# Altium PCB MB_v2.PcbDoc
Units mm, origin at the board's own origin, x right, y up, seen from the top; angles counter-clockwise.
Board outline 152.4 x 101.6 mm, 2 copper layers (Top Layer, Bottom Layer); 66 components, 63 nets, 264 pads, 11 vias.
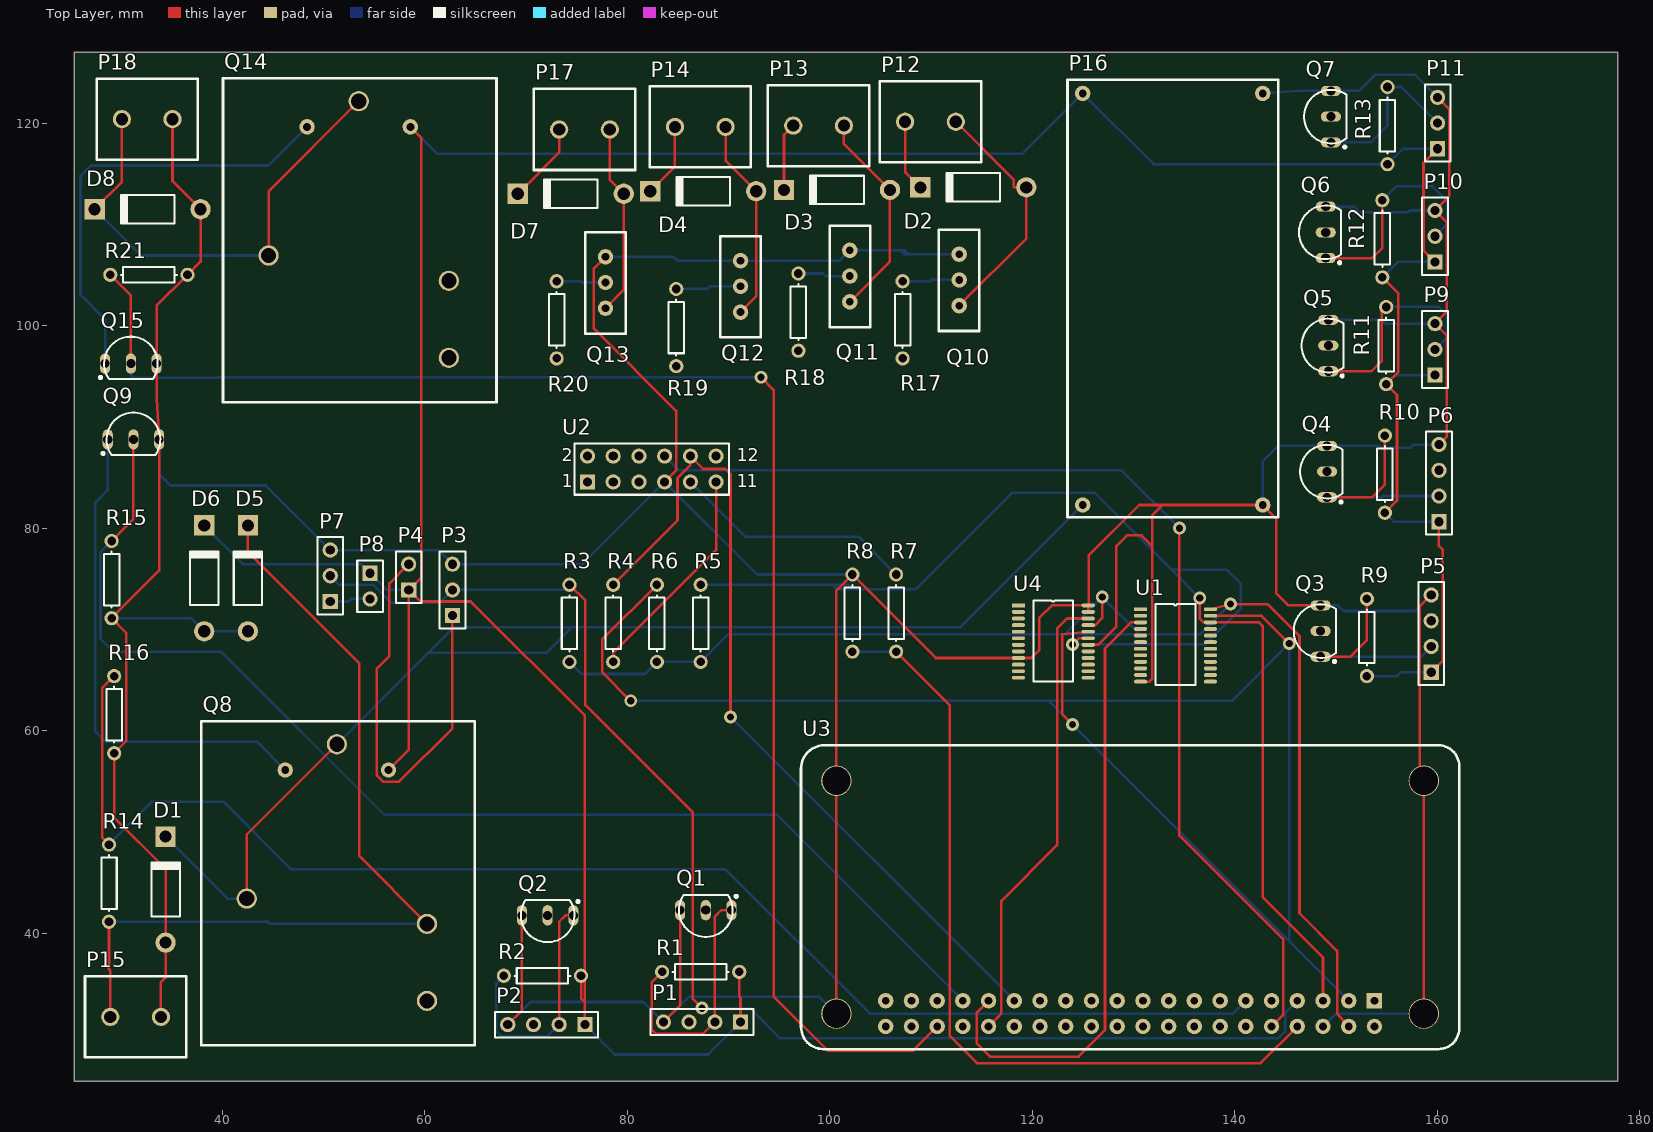
[diagram p0: Top Layer view]
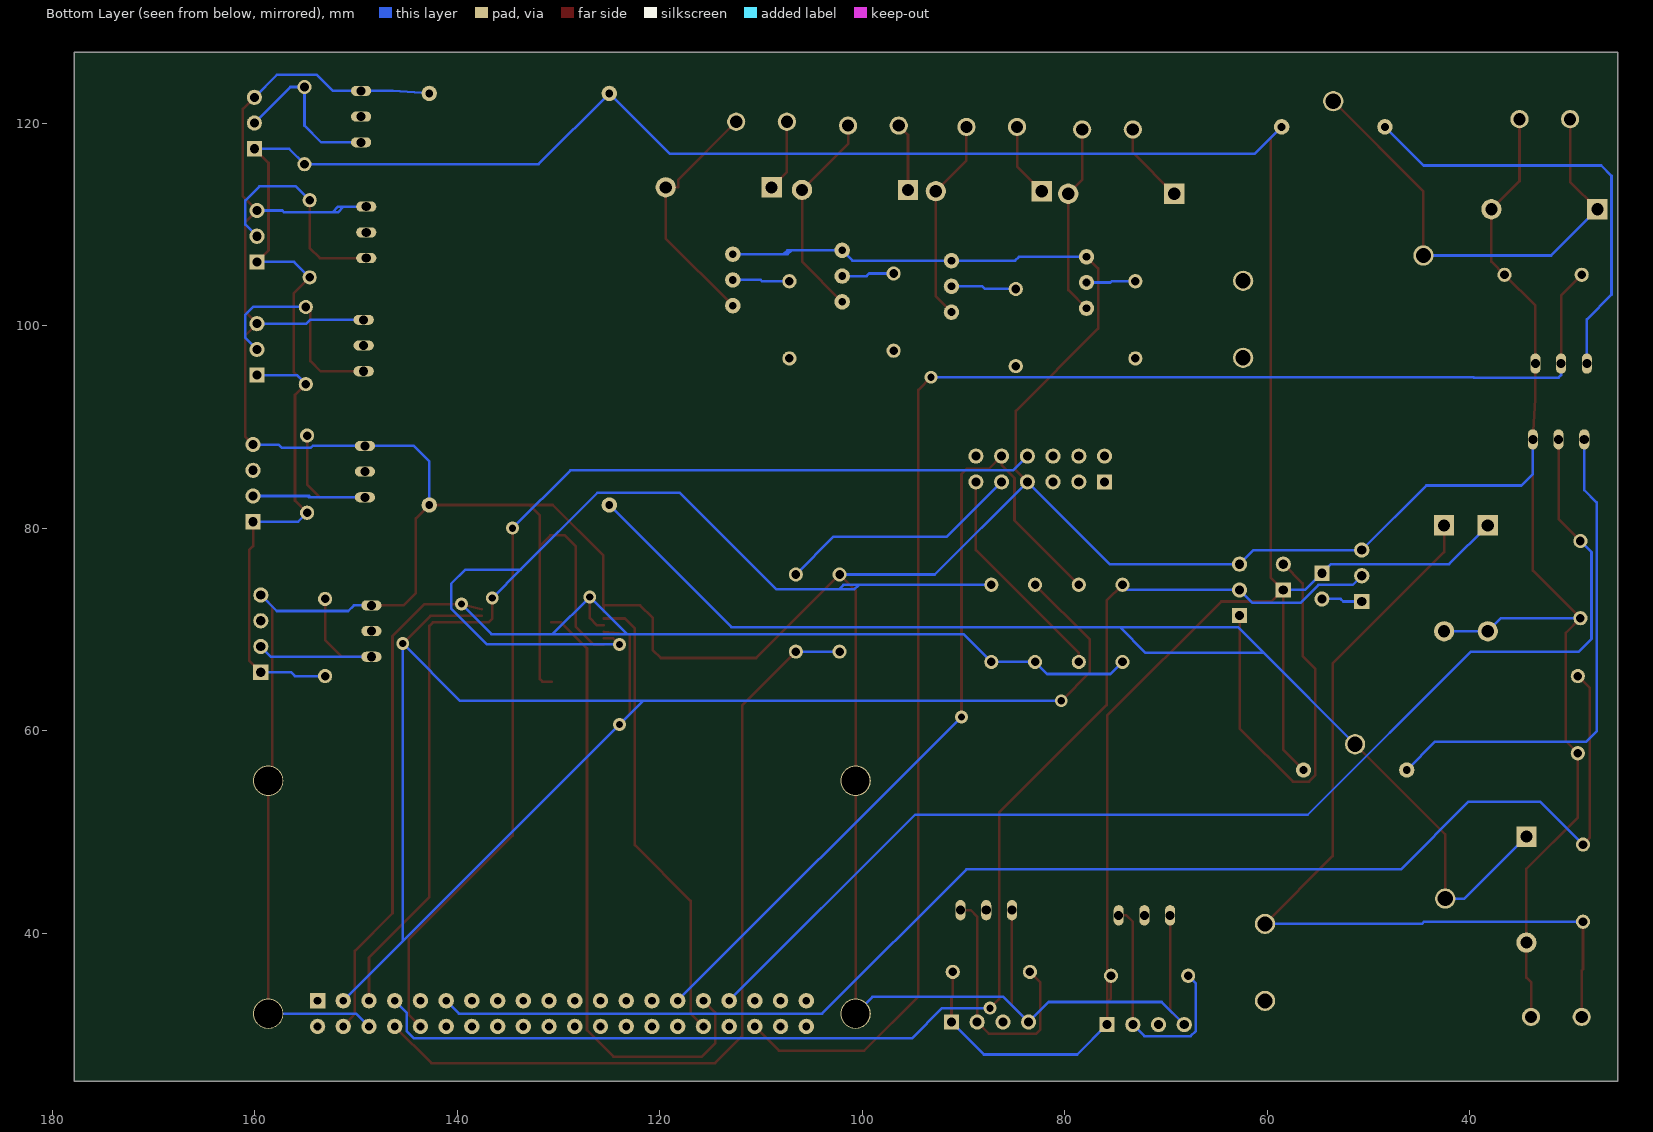
[diagram p1: Bottom Layer view, seen from below]

## Layer stack, top to bottom
Top Solder: solder mask 0.0102, Solder Resist, Dk 3.5
Top Layer: signal copper 0.0356
Dielectric 1: dielectric 0.32, FR-4, Dk 4.8
Bottom Layer: signal copper 0.0356
Bottom Solder: solder mask 0.0102, Solder Resist, Dk 3.5

## Board outline
25.4,25.4 177.8,25.4 177.8,127 25.4,127

## Design rules (kind name [scope] priority, off if disabled: settings)
Clearance [All] p1: gap=0.254
PolygonConnect [All] p1: connectstyle=Relief reliefconductorwidth=0.254 reliefentries=4 polygonreliefangle="90 Angle" airgapwidth=0.254
RoutingVias [All] p1: holewidth=0.711 width=1.27 viastyle="Through Hole" minholewidth=0.711 minwidth=1.27 maxholewidth=0.711 maxwidth=1.27
SolderMaskExpansion [All] p1: expansion=0.102
UnpouredPolygon [All] p1: allowunpoured=FALSE
Width [All] p1: maxlimit=0.254 minlimit=0.254 preferedwidth=0.254
29 further rules are at their usual default settings.

## Components (designator, comment, footprint, x,y, rotation, side; value= is the part's Value field where it differs from the comment)
D1 "Diode 1N4007" DO-41 34.417,44.323 r90 top
D2 "Diode 1N4007" DO-41 114.173,113.665 r180 top
D3 "Diode 1N4007" DO-41 100.711,113.411 r180 top
D4 "Diode 1N4007" DO-41 87.503,113.284 r180 top
D5 "Diode 1N4007" DO-41 42.545,75.057 r90 top
D6 "Diode 1N4007" DO-41 38.227,75.057 r90 top
D7 "Diode 1N4007" DO-41 74.422,113.03 r180 top
D8 "Diode 1N4007" DO-41 32.639,111.506 r180 top
P1 "Header 4" HDR1X4 91.186,31.242 r180 top
P2 "Header 4" HDR1X4 75.819,30.988 r180 top
P3 "Header 3" HDR1X3 62.738,71.374 r90 top
P4 "Header 2" HDR1X2 58.42,73.914 r90 top
P5 "Header 4" HDR1X4 159.385,65.786 r90 top
P6 "Header 4" HDR1X4 160.147,80.645 r90 top
P7 "Header 3" HDR1X3 50.673,72.771 r90 top
P8 "Header 2" HDR1X2 54.61,75.565 r270 top
P9 "Header 3" HDR1X3 159.766,95.123 r90 top
P10 "Header 3" HDR1X3 159.766,106.299 r90 top
P11 "Header 3" HDR1X3 160.02,117.475 r90 top
P12 "Header 2" "Screw Terminal 2" 107.442,120.142 r0 top
P13 "Header 2" "Screw Terminal 2" 96.393,119.761 r0 top
P14 "Header 2" "Screw Terminal 2" 84.709,119.634 r0 top
P15 "Header 2" "Screw Terminal 2" 28.956,31.75 r0 top
P16 "Regulator" "LM2596 Module" 124.968,82.296 r90 top
P17 "Header 2" "Screw Terminal 2" 73.279,119.38 r0 top
P18 "Header 2" "Screw Terminal 2" 30.099,120.396 r0 top
Q1 "2N2222" TO-226AA 87.757,42.291 r180 top
Q2 "2N2222" TO-226AA 72.136,41.783 r180 top
Q3 "2N2222" TO-226AA 148.463,69.85 r90 top
Q4 "2N2222" TO-226AA 149.098,85.598 r90 top
Q5 "2N2222" TO-226AA 149.225,98.044 r90 top
Q6 "2N2222" TO-226AA 148.971,109.22 r90 top
Q7 "2N2222" TO-226AA 149.479,120.65 r90 top
Q8 "Relay" Relay 46.228,56.134 r90 top
Q9 "2N2222" TO-226AA 31.242,88.773 r0 top
Q10 "IRLB8721" TO-220AB 112.776,101.981 r90 top
Q11 "IRLB8721" TO-220AB 101.981,102.362 r90 top
Q12 "IRLB8721" TO-220AB 91.186,101.346 r90 top
Q13 "IRLB8721" TO-220AB 77.851,101.727 r90 top
Q14 "Relay" Relay 48.387,119.634 r90 top
Q15 "2N2222" TO-226AA 30.988,96.266 r0 top
R1 "Res1" AXIAL-0.3 87.249,36.195 r0 top
R2 "Res1" AXIAL-0.3 71.628,35.814 r0 top
R3 "Res1" AXIAL-0.3 74.295,70.612 r270 top
R4 "Res1" AXIAL-0.3 78.613,70.612 r270 top
R5 "Res1" AXIAL-0.3 87.249,70.612 r270 top
R6 "Res1" AXIAL-0.3 82.931,70.612 r270 top
R7 "Res1" AXIAL-0.3 106.553,71.628 r90 top
R8 "Res1" AXIAL-0.3 102.235,71.628 r90 top
R9 "Res1" AXIAL-0.3 153.035,69.215 r270 top
R10 "Res1" AXIAL-0.3 154.813,85.344 r270 top
R11 "Res1" AXIAL-0.3 154.94,98.044 r270 top
R12 "Res1" AXIAL-0.3 154.559,108.585 r270 top
R13 "Res1" AXIAL-0.3 155.067,119.761 r270 top
R14 "Res1" AXIAL-0.3 28.829,44.958 r270 top
R15 "Res1" AXIAL-0.3 29.083,74.93 r90 top
R16 "Res1" AXIAL-0.3 29.337,61.595 r90 top
R17 "Res1" AXIAL-0.3 107.188,100.584 r270 top
R18 "Res1" AXIAL-0.3 96.901,101.346 r270 top
R19 "Res1" AXIAL-0.3 84.836,99.822 r270 top
R20 "Res1" AXIAL-0.3 73.025,100.584 r270 top
R21 "Res1" AXIAL-0.3 32.766,105.029 r180 top
U1 "TCA9548A" TSSOP24 130.683,72.009 r0 top
U2 "SIM800L" HDR2X6 76.073,84.582 r0 top
U3 "RPi" "Raspberry Pi 0 w" 97.155,28.575 r90 top
U4 "MAX7313" TSSOP24 118.618,72.39 r0 top

## Footprints (in the part's own frame and the unit in brackets; to place one, negate y for a bottom-side part, rotate by r counter-clockwise, add the part's x,y. Pads: shape width x height; smd on the part's side, far side on the other; paste and mask are expansions set on the pad)
AXIAL-0.3 [mm] "Axial Device, Thru-Hole; 2 Leads; 0.3 in Pin Spacing"
  round 1.4 hole 0.85: 1(-3.81,0) 2(3.81,0)
  silkscreen extent -2.77,-0.76 2.77,0.76
DO-41 [mm] "Diode, Axial; Body 5.2 x 2.7 mm (LxDia. max), Lead Dia. 0.86 mm (max)"
  round 2 hole 1.2: 1(-5.23,0)
  rect 2x2 hole 1.2: 2(5.23,0)
  silkscreen extent -2.65,-1.4 2.75,1.4
HDR1X2 [mm] "Connector; Header; 2 Position"
  rect 1.5x1.5 hole 0.9: 1(0,0)
  round 1.5 hole 0.9: 2(2.54,0)
  silkscreen extent -1.27,-1.27 3.81,1.27
HDR1X3 [mm] "Connector; Header; 3 Position"
  rect 1.5x1.5 hole 0.9: 1(0,0)
  round 1.5 hole 0.9: 2(2.54,0) 3(5.08,0)
  silkscreen extent -1.27,-1.27 6.35,1.27
HDR1X4 [mm] "Connector; Header; 4 Position"
  rect 1.5x1.5 hole 0.9: 1(0,0)
  round 1.5 hole 0.9: 2(2.54,0) 3(5.08,0) 4(7.62,0)
  silkscreen extent -1.27,-1.27 8.89,1.27
HDR2X6 [mm] "Connector; Header; 6x2 Position"
  rect 1.5x1.5 hole 0.9: 1(0,0)
  round 1.5 hole 0.9: 2(0,2.54) 3(2.54,0) 4(2.54,2.54) 5(5.08,0) 6(5.08,2.54) 7(7.62,0) 8(7.62,2.54) 9(10.16,0) 10(10.16,2.54) 11(12.7,0) 12(12.7,2.54)
  silkscreen extent -1.27,-1.27 13.97,3.81
"LM2596 Module" [mil] "DC-DC regulator used in Uravu Labs for 12V - 5V conversion"
  round 60 hole 30: 1(0,0) 2(1600,0) 3(0,-700) 4(1600,-700)
  silkscreen extent -47,-760 1654,59
"Raspberry Pi 0 w" [mil] "RPi0w"
  rect 60x60 hole 30: 1(187.99,-2229.33)
  round 60 hole 30: 2(87.99,-2229.33) 3(187.99,-2129.33) 4(87.99,-2129.33) 5(187.99,-2029.33) 6(87.99,-2029.33) 7(187.99,-1929.33) 8(87.99,-1929.33) 9(187.99,-1829.33) 10(87.99,-1829.33) 11(187.99,-1729.33) 12(87.99,-1729.33) 13(187.99,-1629.33) 14(87.99,-1629.33) 15(187.99,-1529.33) 16(87.99,-1529.33) 17(187.99,-1429.33) 18(87.99,-1429.33) 19(187.99,-1329.33) 20(87.99,-1329.33) 21(187.99,-1229.33) 22(87.99,-1229.33) 23(187.99,-1129.33) 24(87.99,-1129.33) 25(187.99,-1029.33) 26(87.99,-1029.33) 27(187.99,-929.33) 28(87.99,-929.33) 29(187.99,-829.33) 30(87.99,-829.33) 31(187.99,-729.33) 32(87.99,-729.33) 33(187.99,-629.33) 34(87.99,-629.33) 35(187.99,-529.33) 36(87.99,-529.33) 37(187.99,-429.33) 38(87.99,-429.33) 39(187.99,-329.33) 40(87.99,-329.33)
  round 118.11 hole 110.24 mask+4: S1(137.8,-137.8)
  round 118.11 hole 110.24: S2(1043.31,-137.8) S3(1043.31,-2421.26) S4(137.8,-2421.26)
  silkscreen extent 0,-2559 1181,0
Relay [mm] "L90CSDC12V"
  round 1.524 hole 0.762: 1(0,0) 2(0,-10.2)
  round 2 hole 1.5: 3(2.54,-5.1) 4(-12.7,3.8) 5(-22.8,-14) 6(-15.2,-14)
  silkscreen extent -27.2,-18.7 4.8,8.3
"Screw Terminal 2" [mm]
  round 1.8 hole 1.2: 1(0,0) 2(5,0)
  silkscreen extent -2.5,-4 7.5,4
TO-220AB [mil] "IRLB8721"
  round 60 hole 30: 1(0,0) 2(100,0) 3(200,0)
  silkscreen extent -98,-79 295,79
TO-226AA [mm] "BJT"
  oval 1x2 hole 0.9: 1(-2.54,0) 2(0,0) 3(2.54,0)
  silkscreen extent -3.13,-1.52 2.65,2.65, body extent -2.66,-1.52 2.66,2.66, height 5.33
TSSOP24 [mm]
  rect 1.3x0.38 smd: 1(0,0)
  oval 1.3x0.38 smd: 2(0,-0.65) 3(0,-1.3) 4(0,-1.95) 5(0,-2.6) 6(0,-3.25) 7(0,-3.9) 8(0,-4.55) 9(0,-5.2) 10(0,-5.85) 11(0,-6.5) 12(0,-7.15) 13(6.9,-7.15) 14(6.9,-6.5) 15(6.9,-5.85) 16(6.9,-5.2) 17(6.9,-4.55) 18(6.9,-3.9) 19(6.9,-3.25) 20(6.9,-2.6) 21(6.9,-1.95) 22(6.9,-1.3) 23(6.9,-0.65) 24(6.9,0)
  silkscreen extent 1.48,-7.5 5.42,0.5

## Part data
D1 D2 D3 D4 D5 D6 D7 D8: "1 Amp General Purpose Rectifier"
P1 P2 P5 P6: "Header, 4-Pin"
P3 P7 P9 P10 P11: "Header, 3-Pin"
P4 P8 P12 P13 P14 P15 P17 P18: "Header, 2-Pin"
P16: library part "Header 2X2", "Header, 2-Pin, Dual row"
Q1 Q2 Q3 Q4 Q5 Q6 Q7 Q9 Q15: library part NPN, "NPN Bipolar Transistor"
Q10 Q11 Q12 Q13: library part MOSFET-N, "N-Channel MOSFET"
R1 R2 R3 R4 R5 R6 R7 R8 R9 R10 R11 R12 R13 R14 R15 R16 R17 R18 R19 R20 R21: "Resistor"
U2: "GSM MODULE"
U3: library part "Raspberry Pi 0 w", "Raspberry Pi 0 w GPIO"

## Via types
v1: diameter 1.27, hole 0.711, Top Layer to Bottom Layer, 11 vias

## Nets (pads, with @x,y where several pads share a name; then routed paths per layer and width w, separated by ;. In a path a pad name is that pad's centre, name@x,y a point inside that pad or via, vN(x,y) a via of type N, cw(c..) or ccw(c..) an arc to the next point about the centre after c; other vN are vias at no path point)
3V3: R4.2 U2.11 | length 22
  Top Layer w0.254: R4.2 78.613,67.691 88.773,77.851 U2.11
5V: D6.2 P1.1 P2.1 P4.1 P5.1 P6.1 P8.1 P9.1 P10.1 P11.1 P16.2 Q8.2 Q14.2 R1.2 R2.2 R9.2 R10.2 R11.2 R12.2 R13.2 | length 351.7
  Top Layer w0.254: Q8.2 58.42,58.126 P4.1 ; Q14.2 59.665,118.556 59.665,75.159 P4.1 ; R2.2 75.438,33.579 75.819,33.198 ; P2.1 75.819,33.198 ; R1.2 91.059,33.782 91.186,33.655 P1.1 ; R12.2 156.134,103.2 156.134,95.428 R11.2 156.007,93.167 156.007,82.728 R10.2 ; P5.1 160.528,66.929 160.528,77.851 160.147,78.232 P6.1 ; P10.1 158.623,107.442 158.623,116.078 P11.1 ; P4.1 59.563,72.771 64.541,72.771 75.819,61.493 75.819,35.814 75.819,33.198
  Bottom Layer w0.254: D6.2 42.06,76.454 53.721,76.454 P8.1 56.261,73.914 P4.1 ; Q14.2 61.254,116.967 118.999,116.967 P16.2 131.953,115.951 R13.2 156.591,117.475 P11.1 ; P2.1 78.765,28.042 87.986,28.042 P1.1 ; R9.2 156.007,65.405 156.388,65.786 P5.1 ; R12.2 156.083,106.299 P10.1 ; R10.2 155.702,80.645 P6.1 ; R11.2 155.829,95.123 P9.1
5V1WA: P3.1 P4.2 | length 43.2
  Top Layer w0.254: P4.2 56.515,74.549 56.515,67.386 55.27,66.142 55.27,55.601 55.88,54.991 57.48,54.991 62.738,60.249 P3.1
5V1WB: P7.1 P8.2 | length 4
  Bottom Layer w0.254: P7.1 52.502,72.771 52.756,73.025 P8.2
5VA: R3.2 R5.2 R6.2 U1.24 U3.4 U4.21 | length 133.5
  Top Layer w0.254: U4.21 126.218,70.44 126.898,71.12 v1(126.898,73.228) ; U1.24 v1(139.573,72.517) 143.205,72.517 146.38,69.342 146.38,41.986 150.089,38.278 150.089,32.08 U3.4
  Bottom Layer w0.254: R3.2 75.489,65.608 81.737,65.608 R6.2 R5.2 89.992,69.545 123.215,69.545 ; v1(139.573,72.517) 136.601,69.545 130.581,69.545 ; 123.215,69.545 v1(126.898,73.228) 130.581,69.545 ; 123.215,69.545 130.581,69.545
12V: D5.2 P15.1 Q8.6 R14.2 | length 87.6
  Top Layer w0.254: R14.2 28.829,36.449 28.956,36.322 P15.1 ; D5.2 42.545,77.648 53.543,66.65 53.543,47.619 Q8.6
  Bottom Layer w0.254: R14.2 44.526,41.148 44.74,40.934 Q8.6
12VA: D1.2 P16.1 Q8.3 Q8.4 | length 128.2
  Top Layer w0.254: Q8.4 42.428,49.774 Q8.3
  Bottom Layer w0.254: D1.2 40.536,43.434 Q8.4 ; Q8.3 60.345,67.691 ; P16.1 112.903,70.231 74.549,70.231 ; 60.345,67.691 62.885,70.231 74.549,70.231 ; 60.345,67.691 72.009,67.691 74.549,70.231
220V: Q14.6
220VA: D8.2 P18.1 Q14.3 Q14.4 | length 48
  Top Layer w0.254: D8.2 30.099,114.196 P18.1 ; Q14.4 44.587,113.274 Q14.3
  Bottom Layer w0.254: D8.2 31.981,106.934 Q14.4
CE0N_RPI: U3.24
CE1N_RPI: U3.26
CTRL_1W: P3.2 P7.2 R3.1 U3.7 | length 135.3
  Top Layer w0.254: R3.1 75.87,72.847 75.87,62.535 86.487,51.918 86.487,33.503 v1(87.376,32.614)
  Bottom Layer w0.254: P7.2 51.562,74.422 54.966,74.422 56.744,72.644 61.468,72.644 P3.2 73.787,73.914 R3.1 ; v1(87.376,32.614) 92.1,32.614 95.072,29.642 144.272,29.642 144.992,30.362 144.992,32.182 U3.7
CTRL_CONFAN_1: Q6.2
CTRL_CONFAN_2: Q5.2
CTRL_CONFAN_3: Q7.2
CTRL_INTFAN_1: Q2.2
CTRL_INTFAN_2: Q1.2
CTRL_INTFAN_3: Q4.2
CTRL_INTFAN_4: Q3.2
CTRL_PUMP_1: R19.2
CTRL_PUMP_2: R18.2
CTRL_PUMP_3: R17.2
CTRL_PUMP_4: R20.2
GND: D1.1 D5.1 D6.1 D8.1 P1.4 P2.4 P3.3 P5.4 P6.4 P7.3 P9.3 P10.3 P11.3 P15.2 P16.3 P16.4 P18.2 Q1.3 Q2.3 Q3.3 Q4.3 Q5.3 Q6.3 Q7.3 Q9.3 Q10.3 Q11.3 Q12.3 Q13.3 Q15.3 R8.2 R15.1 R16.1 R21.1 U1.12 U2.7 U3.6 U3.S1 U3.S2 U3.S3 U3.S4 U4.9 U4.18 U4.23 U4.24 | length 639.5
  Top Layer w0.254: P15.2 33.956,35.179 34.417,35.64 D1.1 34.417,46.38 29.337,51.46 R16.1 30.531,58.979 30.531,69.672 R15.1 33.782,75.819 Q9.3 33.528,92.786 Q15.3 33.528,101.981 R21.1 37.869,106.322 D8.1 35.099,114.276 P18.2 ; P2.4 69.596,32.385 Q2.3 ; Q13.3 76.708,105.664 76.708,99.72 84.836,91.592 84.836,85.725 U2.7 ; P1.4 85.217,32.893 Q1.3 ; U3.S1 U3.S2 100.655,73.858 R8.2 110.483,67.19 U4.9 119.888,67.19 120.701,68.003 120.701,71.171 121.92,72.39 U4.24 ; U4.18 126.492,68.49 128.295,70.293 128.295,78.232 129.362,79.299 130.785,79.299 131.826,78.257 ; U4.23 U4.24 ; U1.12 131.572,64.859 131.826,65.113 131.826,78.257 ; Q3.3 145.288,72.39 144.069,73.609 144.069,80.975 P16.3 132.842,82.296 ; U3.S4 U3.S3 158.242,55.488 158.242,72.263 P5.4 ; P11.3 161.163,121.412 161.163,112.776 P10.3 160.909,110.236 160.909,101.346 P9.3 160.909,99.06 160.909,89.027 P6.4 ; U4.24 125.552,72.39 125.552,77.292 130.556,82.296 132.842,82.296 ; 131.826,78.257 131.826,81.28 132.842,82.296
  Bottom Layer w0.254: R15.1 36.934,71.12 D6.1 D5.1 ; Q9.3 33.782,85.344 34.9,84.226 ; P2.4 70.434,33.223 81.585,33.223 P1.4 86.055,33.731 98.999,33.731 U3.S1 ; Q13.3 84.125,106.807 84.531,106.807 84.912,106.426 Q12.3 100.965,106.426 Q11.3 106.985,107.442 ; R8.2 92.837,75.438 U2.7 75.565,76.454 P3.3 61.341,77.851 P7.3 44.298,84.226 ; Q10.3 107.772,107.061 ; P16.3 142.748,86.614 144.272,88.138 Q4.3 154.254,88.138 154.432,87.96 157.328,87.96 157.632,88.265 P6.4 ; P16.4 146.38,123.19 Q7.3 152.273,123.19 153.848,124.765 157.81,124.765 P11.3 ; Q3.3 150.19,72.39 150.749,71.831 157.81,71.831 P5.4 ; U3.6 149.965,32.075 U3.S4 ; Q6.3 151.206,111.76 ; Q5.3 154.508,100.584 154.889,100.203 P9.3 ; P10.3 157.251,111.379 157.074,111.201 152.324,111.201 ; 34.9,84.226 44.298,84.226 ; 34.9,84.226 44.298,84.226 ; 106.985,107.442 107.366,107.061 107.772,107.061 ; 106.985,107.442 107.391,107.442 107.772,107.061 ; 151.206,111.76 151.765,111.201 152.324,111.201 ; 151.206,111.76 151.765,111.76 152.324,111.201
I\N\T\\_EXP: U3.32 U4.22 | length 45.6
  Top Layer w0.254: U3.32 116.95,32.08 116.95,43.214 122.453,48.717 122.453,70.104 123.439,71.09 U4.22
MISO_RPI: U3.21
MOSI_RPI: U3.19
NetP1_2: P1.2 Q1.1 R1.1 | length 25.3
  Top Layer w0.254: R1.1 82.423,35.179 82.423,30.48 82.804,30.099 87.503,30.099 P1.2 88.646,41.656 89.281,42.291 Q1.1
NetP2_2: P2.2 Q2.1 R2.1 | length 24.5
  Top Layer w0.254: P2.2 73.279,41.148 73.914,41.783 Q2.1
  Bottom Layer w0.254: R2.1 67.056,35.052 67.056,30.353 67.564,29.845 72.136,29.845 P2.2
NetP5_2: P5.2 Q3.1 R9.1 | length 20.7
  Top Layer w0.254: Q3.1 151.384,67.31 153.035,68.961 R9.1
  Bottom Layer w0.254: Q3.1 158.369,67.31 P5.2
NetP6_2: P6.2 Q4.1 R10.1 | length 22.5
  Top Layer w0.254: Q4.1 153.543,83.058 154.813,84.328 R10.1
  Bottom Layer w0.254: Q4.1 154.483,83.058 ; P6.2 154.762,83.185 ; 154.483,83.058 154.61,83.185 154.762,83.185 ; 154.483,83.058 154.635,83.058 154.762,83.185
NetP9_2: P9.2 Q5.1 R11.1 | length 21.4
  Top Layer w0.254: Q5.1 153.467,95.504 154.483,96.52 154.483,101.397 R11.1
  Bottom Layer w0.254: R11.1 160.147,101.854 160.909,101.092 160.909,98.806 P9.2
NetP10_2: P10.2 Q6.1 R12.1 | length 22.2
  Top Layer w0.254: Q6.1 153.543,106.68 154.559,107.696 R12.1
  Bottom Layer w0.254: R12.1 155.931,113.767 159.512,113.767 160.909,112.37 160.909,109.982 P10.2
NetP11_2: P11.2 Q7.1 R13.1 | length 16.5
  Bottom Layer w0.254: Q7.1 153.416,118.11 155.067,119.761 R13.1 156.464,123.571 P11.2
NetQ8_1: Q8.1 Q9.1 | length 49.7
  Bottom Layer w0.254: Q9.1 28.702,83.769 27.483,82.55 27.483,59.944 28.499,58.928 43.434,58.928 Q8.1
NetQ10_2: Q10.2 R17.1 | length 5.6
  Bottom Layer w0.254: R17.1 109.906,104.394 110.033,104.521 Q10.2
NetQ11_2: Q11.2 R18.1 | length 5.2
  Bottom Layer w0.254: R18.1 99.314,105.156 99.568,104.902 Q11.2
NetQ12_2: Q12.2 R19.1 | length 6.5
  Bottom Layer w0.254: R19.1 87.884,103.632 88.138,103.886 Q12.2
NetQ13_2: Q13.2 R20.1 | length 4.9
  Bottom Layer w0.254: R20.1 75.362,104.394 75.489,104.267 Q13.2
NetQ14_1: Q14.1 Q15.1 | length 43.9
  Bottom Layer w0.254: Q15.1 28.448,100.635 26.01,103.073 26.01,114.808 27.026,115.824 44.577,115.824 Q14.1
NetR7_2: R7.2 U2.9 | length 24.1
  Bottom Layer w0.254: U2.9 91.643,79.172 102.819,79.172 R7.2
NRST2: Q9.2 R15.2 U3.33 | length 121
  Top Layer w0.254: R15.2 31.242,80.899 Q9.2
  Bottom Layer w0.254: R15.2 27.991,77.648 27.991,69.088 29.286,67.793 39.929,67.793 56.007,51.714 94.776,51.714 U3.33
NRST_MUX: U1.3 U3.31 | length 61.2
  Top Layer w0.254: U3.31 114.529,32.199 114.529,29.134 115.824,27.838 124.562,27.838 127.178,30.455 127.178,68.148 129.739,70.709 U1.3
NRST_UV: Q15.2 R21.2 U3.36 | length 154.1
  Top Layer w0.254: R21.2 30.988,102.997 Q15.2 ; v1(93.218,94.92) 94.463,93.675 94.463,33.757 99.797,28.423 108.213,28.423 U3.36
  Bottom Layer w0.254: Q15.2 30.988,95.123 31.242,94.869 39.599,94.869 39.649,94.92 v1(93.218,94.92)
RST_SIM: R4.1 U2.10 U3.29 | length 84.2
  Top Layer w0.254: R4.1 84.963,80.772 84.963,84.963 86.233,86.233 U2.10 87.503,85.852 89.687,85.852 90.195,85.344 v1(90.195,61.375)
  Bottom Layer w0.254: v1(90.195,61.375) U3.29
RX_RPI: U2.8 U3.10 | length 107.7
  Top Layer w0.254: v1(134.518,80.01) 134.518,49.657 144.78,39.395 144.78,31.97 U3.10
  Bottom Layer w0.254: U2.8 85.09,85.725 128.803,85.725 v1(134.518,80.01)
SCL_RPI: R5.1 U1.22 U3.5 U4.19 | length 137.7
  Top Layer w0.254: v1(123.977,68.529) 124.588,69.14 U4.19 ; v1(136.525,73.127) 136.525,71.09 136.906,70.709 U1.22 142.397,70.709 142.736,70.37 142.736,43.582 148.7,37.617 U3.5
  Bottom Layer w0.254: R5.1 100.33,74.422 ; v1(123.977,68.529) 137.058,68.529 140.589,72.06 140.589,74.524 139.192,75.921 133.731,75.921 ; v1(136.525,73.127) 133.731,75.921 ; 100.33,74.422 100.787,73.965 102.311,73.965 ; 100.33,74.422 101.854,74.422 102.311,73.965 ; 102.311,73.965 108.483,73.965 118.008,83.49 126.162,83.49 133.731,75.921
SCLK_RPI: U3.23
SDA_RPI: R6.1 U1.23 U3.3 U4.20 | length 174.4
  Top Layer w0.254: v1(80.34,62.967) 77.521,65.786 77.521,69.012 R6.1 ; v1(123.977,60.613) 122.961,61.629 122.961,69.545 U4.20 ; U1.23 142.636,71.359 v1(145.364,68.631)
  Bottom Layer w0.254: v1(80.34,62.967) 121.623,62.967 ; U3.3 145.364,39.226 ; 121.623,62.967 v1(123.977,60.613) 145.364,39.226 ; 121.623,62.967 139.7,62.967 v1(145.364,68.631) 145.364,39.226
SENSE_UPS: R14.1 R16.2 U3.11 | length 140.6
  Top Layer w0.254: R14.1 28.143,49.454 28.143,64.211 R16.2
  Bottom Layer w0.254: R14.1 33.071,53.01 40.132,53.01 46.812,46.33 89.713,46.33 103.962,32.08 139.81,32.08 U3.11
TACH_INTFAN_1: P2.3
TACH_INTFAN_2: P1.3
TACH_INTFAN_3: P6.3
TACH_INTFAN_4: P5.3
TX_RPI: R7.1 R8.1 U3.8 | length 81.4
  Top Layer w0.254: R7.1 111.862,62.509 111.862,29.845 114.529,27.178 142.528,27.178 U3.8
  Bottom Layer w0.254: R8.1 R7.1
VPUMP_1+: D4.2 P14.1 | length 7.4
  Top Layer w0.254: D4.2 84.709,115.72 P14.1
VPUMP_1-: D4.1 P14.2 Q12.1 | length 20.2
  Top Layer w0.254: P14.2 89.709,116.308 D4.1 92.733,102.893 Q12.1
VPUMP_2+: D3.2 P13.1 | length 6.7
  Top Layer w0.254: D3.2 95.481,118.849 P13.1
VPUMP_2-: D3.1 P13.2 Q11.1 | length 20.9
  Top Layer w0.254: P13.2 101.393,117.959 D3.1 105.941,106.322 Q11.1
VPUMP_3+: D2.2 P12.1 | length 7.1
  Top Layer w0.254: P12.1 107.442,115.166 D2.2
VPUMP_3-: D2.1 P12.2 Q10.1 | length 24.5
  Top Layer w0.254: P12.2 118.161,114.423 118.161,113.665 D2.1 119.403,108.608 Q10.1
VPUMP_4+: D7.2 P17.1 | length 8
  Top Layer w0.254: D7.2 73.279,117.117 P17.1
VPUMP_4-: D7.1 P17.2 Q13.1 | length 19
  Top Layer w0.254: Q13.1 79.652,103.528 D7.1 78.279,114.403 P17.2
pads on no net: Q8.5 Q14.5 U1.1 U1.2 U1.4 U1.5 U1.6 U1.7 U1.8 U1.9 U1.10 U1.11 U1.13 U1.14 U1.15 U1.16 U1.17 U1.18 U1.19 U1.20 U1.21 U2.1 U2.2 U2.3 U2.4 U2.5 U2.6 U2.12 U3.1 U3.2 U3.9 U3.12 U3.13 U3.14 U3.15 U3.16 U3.17 U3.18 U3.20 U3.22 U3.25 U3.27 U3.28 U3.30 U3.34 U3.35 U3.37 U3.38 U3.39 U3.40 U4.1 U4.2 U4.3 U4.4 U4.5 U4.6 U4.7 U4.8 U4.10 U4.11 U4.12 U4.13 U4.14 U4.15 U4.16 U4.17

## Text inside footprints (layer, text, board x,y; h text height)
U2: Top Overlay "12" at 90.805,86.614 h1.27; Top Overlay "1" at 91.821,84.074 h1.27; Top Overlay "1" at 90.805,84.074 h1.27; Top Overlay "1" at 73.533,84.074 h1.27; Top Overlay "2" at 73.533,86.614 h1.27